# Altium PCB PCB1.PcbDoc
Units mm, origin at the board's own origin, x right, y up, seen from the top; angles counter-clockwise.
Board outline 152.4 x 101.6 mm, 2 copper layers (Top Layer, Bottom Layer); 36 components, 51 nets, 169 pads, 0 vias.
Unrouted connection lines stored in the file: 92.
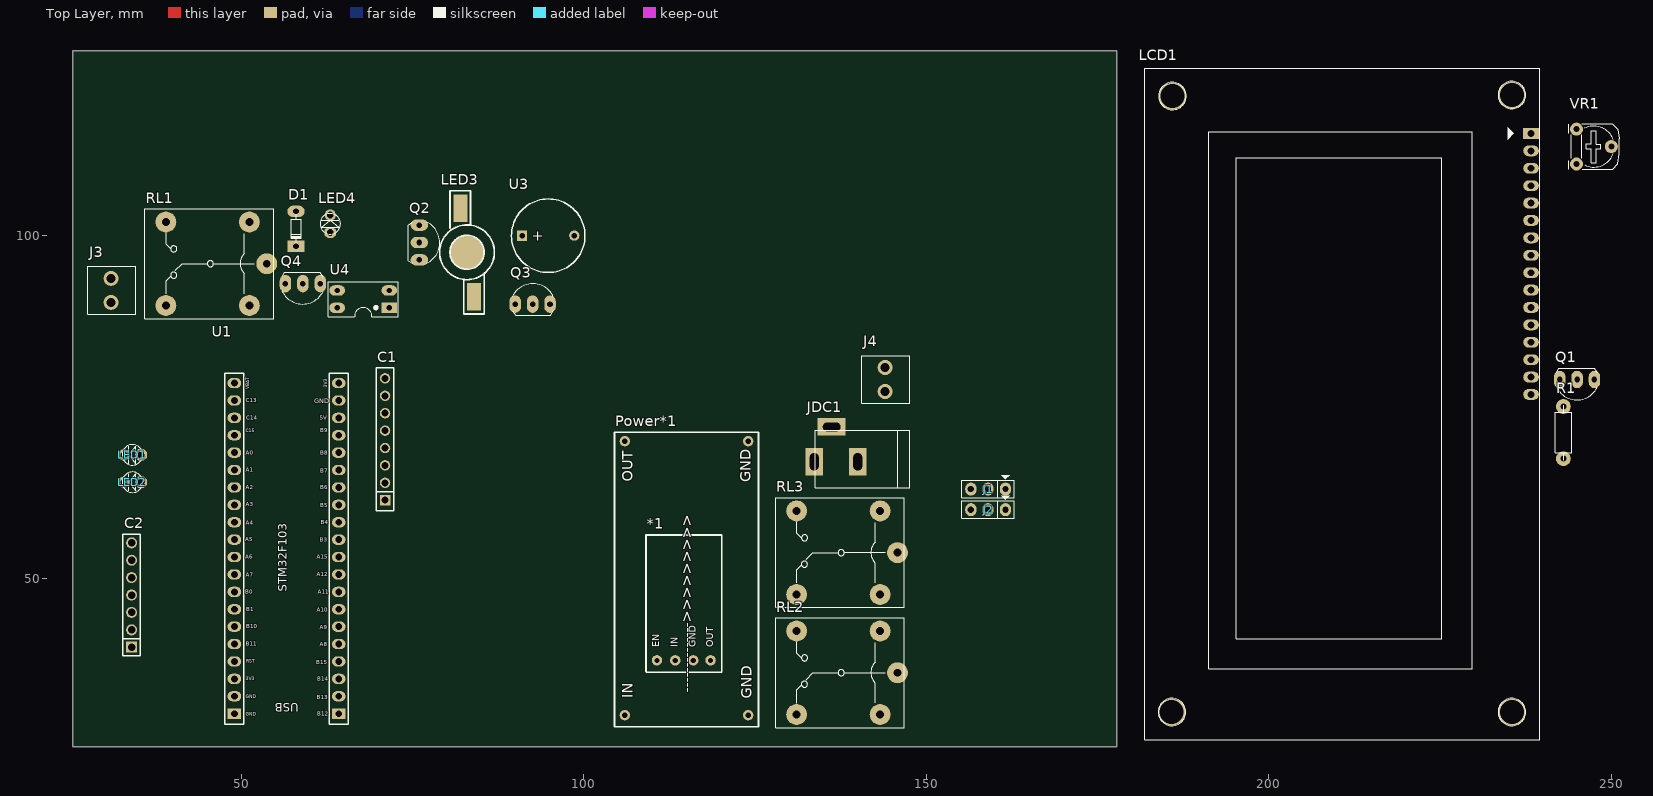
[diagram p0: Top Layer view]
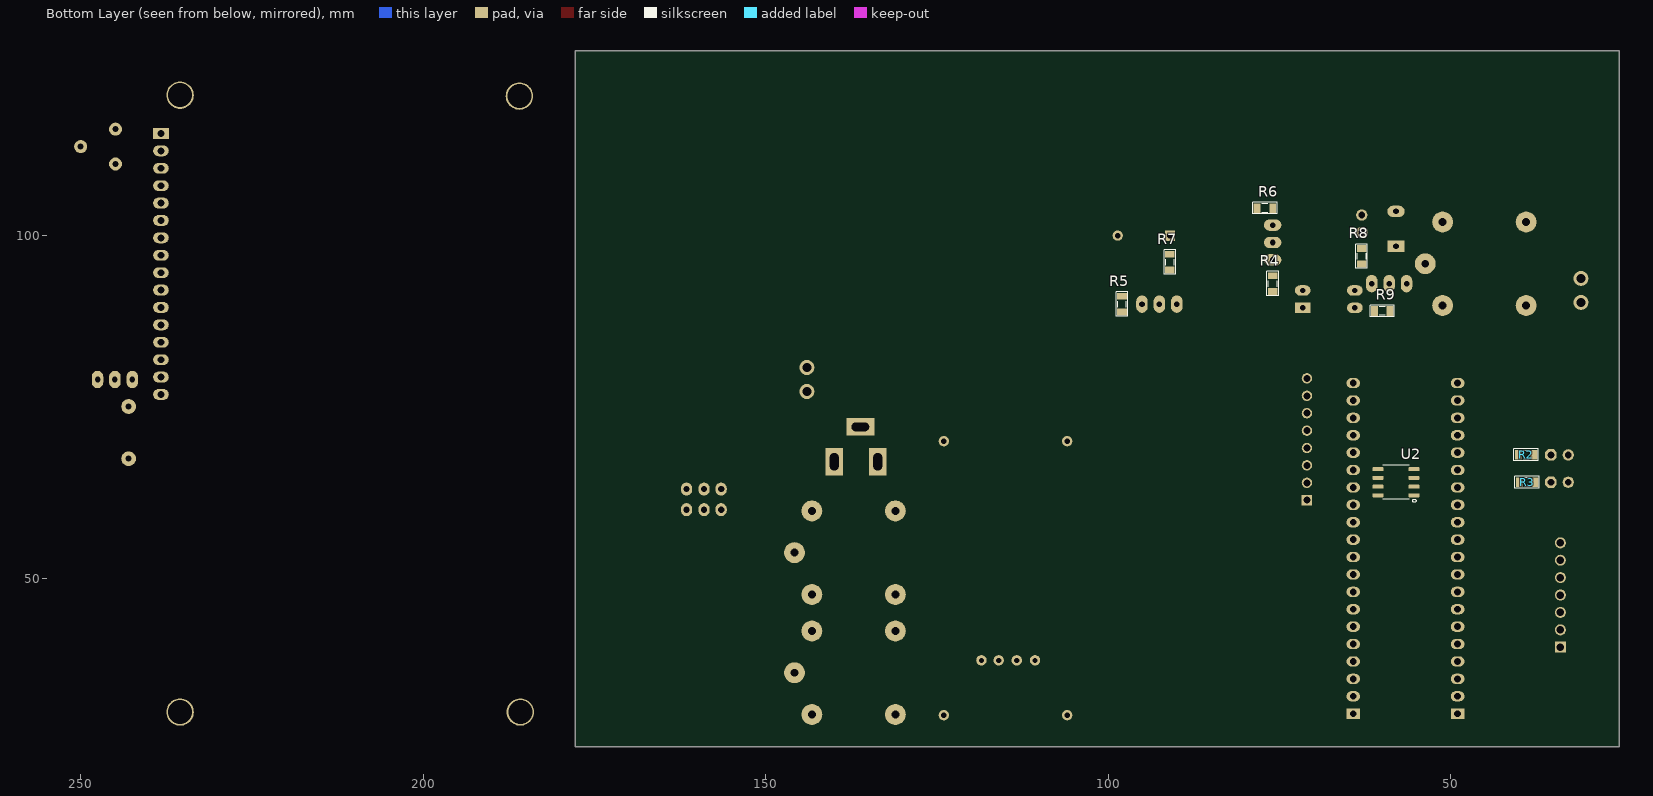
[diagram p1: Bottom Layer view, seen from below]

## Layer stack, top to bottom
Top Solder: solder mask 0.0102, Solder Resist, Dk 3.5
Top Layer: signal copper 0.0356
Dielectric 1: dielectric 0.32, FR-4, Dk 4.8
Bottom Layer: signal copper 0.0356
Bottom Solder: solder mask 0.0102, Solder Resist, Dk 3.5

## Board outline
25.4,25.4 177.8,25.4 177.8,127 25.4,127

## Design rules (kind name [scope] priority, off if disabled: settings)
Clearance [All] p1: gap=0.254 ignorepadtopadclearanceinfootprint=FALSE except(0: Arc-Hole Track-Hole SMDPad-Hole THPad-Hole Via-Hole Fill-Hole Poly-Hole Region-Hole Text-Hole)
PolygonConnect [All] p1: connectstyle=Relief reliefconductorwidth=0.254 reliefentries=4 polygonreliefangle="90 Angle" airgapwidth=0.254
RoomDefinition Power [InComponentClass('Power')] p1: confinementstyle=ConfineIn formatcopy=TRUE lockcomponents=FALSE outline 0,0 50.8,0 50.8,25.4 0,25.4
RoomDefinition Main [InComponentClass('Main')] p2: confinementstyle=ConfineIn formatcopy=TRUE lockcomponents=FALSE outline 0,0 50.8,0 50.8,25.4 0,25.4
RoutingVias [All] p1: holewidth=0.711 width=1.27 viastyle="Through Hole" minholewidth=0.711 minwidth=1.27 maxholewidth=0.711 maxwidth=1.27
SolderMaskExpansion [All] p1: expansion=0.102 istentingtop=FALSE
Width [All] p1: maxlimit=0.254 minlimit=0.254 preferedwidth=0.254
30 further rules are at their usual default settings.

## Classes and differential pairs
component class Power: *1 J4 JDC1 Power*1 RL2 RL3
component class Main: C1 C2 D1 J1 J2 J3 LCD1 LED1 LED2 LED3 LED4 Q1 Q2 Q3 Q4 R1 R2 R3 R4 R5 R6 R7 R8 R9 RL1 U1 U2 U3 U4 VR1

## Components (designator, comment, footprint, x,y, rotation, side; value= is the part's Value field where it differs from the comment)
*1 "Module QS-1205CME-3A" QS-1205CME-3A 110.691,38 r0 top
C1 "RFID" JP8-C1T 71,61.38 r90 top
C2 "JP7" JP7-D1T 34,39.92 r90 top
D1 "Diode" DIO-0.5A-SMALL 58,101 r90 top value=1N5007
J1 "Jumper 3" JP3 159.025,63 r180 top value=J3
J2 "Jumper 3" JP3 159.025,60 r180 top value=J3
J3 "KF2" KF2-3.5 31,92 r90 top
J4 "KF2" KF2-3.5 144,79 r90 top
JDC1 "Jac DC" DC-IN 136.825,69.54 r180 top
LCD1 "LCD 20x4A" LCD20X4A 238.283,114.916 r270 top
LED1 "LED" LED-3MM-BLUE 34,68 r180 top value="LED 3 ly Single Colour"
LED2 "LED" LED-3MM-BLUE 34,64 r180 top value="LED 3 ly Single Colour"
LED3 "LED" "led 1/3w" 82.983,97.562 r90 top value="LED 3 ly Single Colour"
LED4 "LED" LED-3MM-YELLOW 63,100.46 r90 top value="LED 3 ly Single Colour"
Power*1 "Module Buck Boot" Module_BUCK_BOOT 125.5,28.3 r90 top
Q1 "C1815" QTO-92 245,79 r180 top
Q2 "C1815" QTO-92 76,99 r270 top
Q3 "C1815" QTO-92 92.54,90 r0 top
Q4 "2N222" TO92-123 59,93 r180 top value=C1815
R1 "Res" RES-1/4W-SMALL 243,71 r90 top
R2 "Res" RES-SMD-0805 39,68 r0 bottom
R3 "Res" RES-SMD-0805 38.857,64 r0 bottom
R4 "Res-SMD" RES-SMD-0805 76,93 r90 bottom
R5 "Res-SMD" RES-SMD-0805 98,90 r90 bottom
R6 "Res-SMD" RES-SMD-0805 77.143,104 r0 bottom
R7 "Res-SMD" RES-SMD-0805 91,96.143 r90 bottom
R8 "Res" RES-SMD-0805 63,97 r270 bottom
R9 "Res" RES-SMD-0805 60,89 r180 bottom
RL1 "Relay 10A/12V" RL_SPDT_10A 53.732,95.904 r180 top value="Relay SPDT, 10A, 12V"
RL2 "Relay 10A/12V" RL_SPDT_10A 145.806,36.198 r180 top value="Relay SPDT, 10A, 12V"
RL3 "Relay 10A/12V" RL_SPDT_10A 145.806,53.724 r180 top value="Relay SPDT, 10A, 12V"
U1 "STM32F103C8T6_Blue" "STM32F103 Blue Pill" 54.08,50.54 r90 top
U2 "AT24Cxx" SOP8smd 58,64 r0 bottom
U3 "BUZZ" BUZZER_through_hole 91,100 r0 top
U4 "PC817" DIP4/W0.3 71.62,89.46 r90 top
VR1 "10K" VR 244.92,115.54 r270 top value="VR 10K"

## Footprints (in the part's own frame and the unit in brackets; to place one, negate y for a bottom-side part, rotate by r counter-clockwise, add the part's x,y. Pads: shape width x height; smd on the part's side, far side on the other; paste and mask are expansions set on the pad)
BUZZER_through_hole [mm]
  rect 1.5x1.5 hole 0.8: 1(0,0)
  round 1.5 hole 0.8: 2(7.62,0.013)
  silkscreen extent -1.55,-5.38 9.18,5.36, body extent -2.22,-6 9.78,6, height 4.5
DC-IN [mil] "Jac DC input"
  rect 100x160 hole 50 slot 100 at 90 deg: 1(125,100) 2(-125,100)
  rect 160x100 hole 50 slot 100 at 0 deg: 3(25,-100)
  silkscreen extent -425,-80 120,250, body extent -410,-105 134,269, height 434
DIO-0.5A-SMALL [mil] "Diode muoi, W 80mil, L 300mil"
  oval 65x100 hole 32: 1(100,0)
  rect 65x100 hole 32: 2(-100,0)
  silkscreen extent -80,-30 80,28, body extent -108,-33 108,32, height 61
DIP4/W0.3 [mil] "4 PIN, W 300mil, Pin to pin 100mil"
  rect 60x90 hole 31: 1(0,0)
  oval 60x90 hole 31: 2(100,0) 3(100,300) 4(0,300)
  silkscreen extent -50,-50 150,350, body extent -59,-10 159,305, height 170
JP3 [mil] "Jumper 3"
  oval 65x75 hole 36: 1(-100,0) 2(1,0) 3(99,0)
  silkscreen extent -150,-81 150,50, body extent -150,-60 150,55, height 355
JP7-D1T [mm] "7 pins, 1 row, straight, gold plating"
  rect 1.6x1.6 hole 1.1: 1(0,0)
  round 1.6 hole 1.1: 2(2.54,0) 3(5.08,0) 4(7.62,0) 5(10.16,0) 6(12.7,0) 7(15.24,0)
  silkscreen extent -1.27,-1.27 16.51,1.27, body extent -1.27,-1.27 16.51,1.27, height 8.54
JP8-C1T [mm] "8 row, straight, gold plating"
  rect 1.52x1.52 hole 1.02: 1(0,0)
  round 1.52 hole 1.02: 2(2.54,0) 3(5.08,0) 4(7.62,0) 5(10.16,0) 6(12.7,0) 7(15.24,0) 8(17.78,0)
  silkscreen extent -1.52,-1.27 19.3,1.27, body extent -1.52,-1.25 19.3,1.25, height 8.51
KF2-3.5 [mm] "3,50mm - modular - blue - Horizontal wire entry - Pressure clamp - 8,4mm height - 02p"
  round 2.2 hole 1.3: 1(-1.75,0) 2(1.75,0)
  silkscreen extent -3.5,-3.6 3.5,3.4, body extent -3.95,-3.6 4.05,3.4, height 8.41
LCD20X4A [mil] "LCD dipslay 20x4, 16 pin"
  rect 62x90 hole 39: 1(0,0)
  oval 62x90 hole 39: 2(100,0) 3(200,0) 4(300,0) 5(400,0) 6(500,0) 7(600,0) 8(700,0) 9(800,0) 10(900,0) 11(1000,0) 12(1100,0) 13(1200,0) 14(1300,0) 15(1400,0) 16(1500,0)
  round 157.48 hole 137.8: "Hole 0"(-220,-110) "Hole 0"(-215,-2060) "Hole 0"(3325,-110) "Hole 0"(3325,-2065)
  silkscreen extent -375,-2220 3485,50, body extent -392,-2264 3466,98, height 417
"led 1/3w" [mm]
  rect 4x2 smd: 1(-6.5,-1) 2(6.438,0.983)
  round 5 smd: ""(0.008,0.022)
  silkscreen extent -9,-3.97 9,4.01, body extent -7.25,-4.06 7.25,4.06, height 5.32
LED-3MM-BLUE [mil]
  oct 65x65 hole 40: 1(-55,0)
  round 65 hole 40: 2(45,0)
  silkscreen extent -64,-59 54,59, body extent -72,-65 54,65, height 184
LED-3MM-YELLOW [mil]
  oct 65x65 hole 40: 1(0,0)
  round 65 hole 40: 2(100,0)
  silkscreen extent -9,-59 109,59, body extent -27,-77 117,80, height 181
Module_BUCK_BOOT [mil]
  round 60 hole 30: 1(66.93,767.72) 2(66.93,59.06) 3(1641.73,59.06) 4(1641.73,767.72)
  silkscreen extent 0,0 1693,827, body extent -1,-1 1692,826, height 583
QS-1205CME-3A [mil]
  round 60 hole 30: 1(0,0) 2(105,0) 3(209,0) 4(308,0)
  silkscreen extent -63,-68 373,721, body extent -60,-66 374,721, height 535
QTO-92 [mil] "TO-92"
  oval 66x100 hole 32: 1(-100,0) 2(0,0) 3(100,0)
  silkscreen extent -117,-65 120,118, body extent -109,-66 109,95, height 245
RES-1/4W-SMALL [mil]
  round 85 hole 35: 1(-140,0) 2(160,0)
  silkscreen extent -148,-47 166,47, body extent -152,-47 172,47, height 97
RES-SMD-0805 [mil]
  rect 39.37x55 smd: 1(-45,0) 2(45,0)
  silkscreen extent -70,-34 70,33, body extent -39,-25 39,25, height 31
RL_SPDT_10A [mil] "Relay SPDT, 5 pin, 10A,W 650mil, L 800mil, H 800mil"
  round 120 hole 45: 1(0,0) 2(580,240) 3(580,-240) 4(100,-240) 5(100,240)
  silkscreen extent -40,-315 700,315, body extent -46,-304 706,306, height 602
SOP8smd [mm]
  rrect40% 1.58x0.589 smd: 1(-2.625,1.905) 2(-2.625,0.635) 3(-2.625,-0.635) 4(-2.625,-1.905) 5(2.625,-1.905) 6(2.625,-0.635) 7(2.625,0.635) 8(2.625,1.905)
  silkscreen extent -2.93,-2.51 1.95,2.95, body extent -2.92,-2.41 3.06,2.49, height 1.58
"STM32F103 Blue Pill" [mm]
  rect 1.5x2 hole 1: 1(-20.32,-10.16) 40(-20.32,5.08)
  oval 1.5x2 hole 1: 2(-17.78,-10.16) 3(-15.24,-10.16) 4(-12.7,-10.16) 5(-10.16,-10.16) 6(-7.62,-10.16) 7(-5.08,-10.16) 8(-2.54,-10.16) 9(0,-10.16) 10(2.54,-10.16) 11(5.08,-10.16) 12(7.62,-10.16) 13(10.16,-10.16) 14(12.7,-10.16) 15(15.24,-10.16) 16(17.78,-10.16) 17(20.32,-10.16) 18(22.86,-10.16) 19(25.4,-10.16) 20(27.94,-10.16) 21(27.94,5.08) 22(25.4,5.08) 23(22.86,5.08) 24(20.32,5.08) 25(17.78,5.08) 26(15.24,5.08) 27(12.7,5.08) 28(10.16,5.08) 29(7.62,5.08) 30(5.08,5.08) 31(2.54,5.08) 32(0,5.08) 33(-2.54,5.08) 34(-5.08,5.08) 35(-7.62,5.08) 36(-10.16,5.08) 37(-12.7,5.08) 38(-15.24,5.08) 39(-17.78,5.08)
  silkscreen extent -21.84,-11.56 29.34,6.48, body extent -23.62,-14.22 33.94,8.64, height 14.77
TO92-123 [mil] "TO-92"
  oval 66x100 hole 32: 1(-100,0) 2(0,0) 3(100,0)
  silkscreen extent -117,-65 120,118, body extent -109,-66 109,95, height 245
VR [mil] "Resistor Variable"
  round 75 hole 35: 1(0,0) 2(100,200) 3(200,0)
  silkscreen extent -31,-44 231,246, body extent -87,-30 307,372, height 165

## Part data
*1: "Mạch Hạ Áp Mini 3A Nhiều Đầu Ra QS-1205CME-3A"
C1: library part JP8, "WR-PHD 2.54 mm Angled Socket Header", Manufacturer="W¨¹rth Elektronik eiSos GmbH", partNo=613008143121, ComponentLink1 Description=Manufacturer, ComponentLink1URL=http://www.we-online.com, ComponentLink2 Description=Datasheet, ComponentLink2URL=http://katalog.we-online.de/em/datasheet/6130xx143121.pdf, Created by="Karrer Zheng", Created Date="29 March 2013", NoPins=08
C2: "WR-PHD 2.54 mm Angled Socket Header", Manufacturer="W¨¹rth Elektronik eiSos GmbH", partNo=613007143121, ComponentLink1 Description=Manufacturer, ComponentLink1URL=http://www.we-online.com, ComponentLink2 Description=Datasheet, ComponentLink2URL=http://katalog.we-online.de/em/datasheet/6130xx143121.pdf, Created by="Karrer Zheng", Created Date="29 March 2013", NoPins=07
D1: "Default Diode", Code - JEDEC=DO-214-AB, Published=8-Jun-2000, Publisher="Altium Limited", Revision="July-2002: Re-released for DXP Platform."
J1 J2: library part JP3
J3 J4: Manufacturer="Würth Elektronik eiSos GmbH", partNo=691103110002, ComponentLink1 Description=Manufacturer, ComponentLink1URL=http://www.we-online.com, ComponentLink2 Description=Datasheet, ComponentLink2URL=http://katalog.we-online.de/em/datasheet/6911031100xx.pdf, Created by="Karrer Zheng", Created Date="29 October 2013", NoPins=2
JDC1: library part DCIN, "Jac DC input"
LCD1: library part LCD20x4A, "LCD dipslay 20 char, 4 line"
LED1 LED2 LED3 LED4: "LED Single colour Green and Red"
Q1 Q2 Q3 Q4: "NPN 600mW, ECB"
  Q4: Creat by=MT-TECH.VN
R1: Manufacturer="Generic Components", Class=Passive, Published=08/06/2000, Publisher="Altium Hobart Technology Centre", SubClass=R
R2 R3 R8 R9: library part Res-SMD, "Resistor", Manufacturer="Generic Components", Class=Passive, Published=08/06/2000, Publisher="Altium Hobart Technology Centre"
R4 R5 R6 R7: "Resistor", Manufacturer="Generic Components", Class=Passive, Published=08/06/2000, Publisher="Altium Hobart Technology Centre"
RL1 RL2 RL3: library part "Relay 1", "Relay SPDT,10A - 12VDC 5 Pin"
U1: "Kit STM32F103C8T6 Blue Pill"
U3: library part Speaker, "Loudspeaker"
U4: "Single Opto"
VR1: library part VR1, "Var Resistor"

## Nets (pads, with @x,y where several pads share a name; then routed paths per layer and width w, separated by ;. In a path a pad name is that pad's centre, name@x,y a point inside that pad or via, vN(x,y) a via of type N, cw(c..) or ccw(c..) an arc to the next point about the centre after c; other vN are vias at no path point)
+3v3: *1.4 C1.8 U1.20
+5: D1.2 J1.3 J2.3 LCD1.2 Power*1.4 Q1.2 Q2.2 Q3.2 R8.1 RL1.5 U2.8 U4.3 VR1.3
+12: *1.2 Power*1.1 RL1.3 RL2.1
BAT: J4.2 RL2.2 RL3.1
Buzz: R5.1 U1.6
"CB HongNgoai": J1.2 U1.16
"CB HongNgoai 2": J2.2 U1.17
Cot1: C2.7 U1.30
Cot2: C2.6 U1.31
Cot3: C2.5 U1.32
D4: LCD1.11 U1.2
D5: LCD1.12 U1.3
D6: LCD1.13 U1.4
D7: LCD1.14 U1.5
EN: LCD1.6 U1.29
GND: *1.3 C1.6 J1.1 J2.1 J3.1 J4.1 JDC1.2 LCD1.1 LCD1.16 LED1.1 LED2.1 LED3.1 Power*1.2 Power*1.3 Q4.1 RL2.5 U1.19 U2.1 U2.2 U2.3 U2.4 U3.2 U4.1 VR1.1
Hang1: C2.4 U1.33
Hang2: C2.3 U1.34
Hang3: C2.2 U1.35
Hang4: C2.1 U1.36
"LED LCD": R1.1 U1.1
"LED Show": R4.1 U1.7
MISO: C1.4 U1.12
MOSI: C1.3 U1.13
NetD1_1: D1.1 LED4.2 Q4.3 RL1.4
NetJ3_2: J3.2 RL1.1
NetLCD1_3: LCD1.3 VR1.2
NetLCD1_15: LCD1.15 Q1.1
NetLED1_2: LED1.2 R2.1
NetLED2_2: LED2.2 R3.1
NetLED3_2: LED3.2 R6.2
NetLED4_1: LED4.1 R8.2
NetQ1_3: Q1.3 R1.2
NetQ2_1: Q2.1 R6.1
NetQ2_3: Q2.3 R4.2
NetQ3_1: Q3.1 R7.1
NetQ3_3: Q3.3 R5.2
NetQ4_2: Q4.2 R9.2
NetR2_2: R2.2 U1.25
NetR3_2: R3.2 U1.26
NetR7_2: R7.2 U3.1
NetR9_1: R9.1 U4.4
RS: LCD1.4 U1.27
"RST RFID": C1.7 U1.9
RW: LCD1.5 U1.28
SCK: C1.2 U1.11
SCL: U1.14 U2.6
SDA: U1.15 U2.5
"SIGN RELAY": U1.8 U4.2
SS: C1.1 U1.10
VCC: JDC1.1 RL2.3 RL2.4 RL3.3
pads on no net: "LCD1.Hole 0" *1.1 C1.5 JDC1.3 LCD1.7 LCD1.8 LCD1.9 LCD1.10 LED3. RL1.2 RL3.2 RL3.4 RL3.5 U1.18 U1.21 U1.22 U1.23 U1.24 U1.37 U1.38 U1.39 U1.40 U2.7

## Text inside footprints (layer, text, board x,y; h text height)
*1: Top Overlay "OUT" at 118.87,39.905 h1 r90; Top Overlay "GND" at 116.356,39.905 h1 r90; Top Overlay "IN" at 113.714,39.905 h1 r90; Top Overlay "EN" at 111.047,39.905 h1 r90
Power*1: Top Overlay "OUT" at 107.125,64.075 h1.52 r90; Top Overlay "IN" at 107.15,32.45 h1.52 r90; Top Overlay "GND" at 124.375,64 h1.52 r90; Top Overlay "GND" at 124.5,32.4 h1.52 r90; Top Overlay "-------------->>>>>>>>>" at 115.8,33.3 h1.52 r90
U1: Top Overlay "C13" at 50.685,75.661 h0.6; Top Overlay "C14" at 50.711,73.095 h0.6; Top Overlay "C15" at 50.66,71.292 h0.5; Top Overlay "A0" at 50.634,68.041 h0.6; Top Overlay "A1" at 50.66,65.551 h0.6; Top Overlay "A2" at 50.66,62.961 h0.6; Top Overlay "A3" at 50.66,60.471 h0.6; Top Overlay "A4" at 50.634,57.779 h0.6; Top Overlay "A5" at 50.609,55.391 h0.6; Top Overlay "A6" at 50.609,52.851 h0.6; Top Overlay "A7" at 50.685,50.21 h0.6; Top Overlay "B0" at 50.609,47.695 h0.6; Top Overlay "B1" at 50.711,45.206 h0.6; Top Overlay "B11" at 50.685,40.101 h0.6; Top Overlay "B10" at 50.711,42.666 h0.6; Top Overlay "RST" at 50.711,37.662 h0.5; Top Overlay "3V3" at 50.685,35.097 h0.5; Top Overlay "GND" at 50.66,32.481 h0.5; Top Overlay "GND" at 50.66,29.941 h0.5; Top Overlay "GND" at 60.693,75.508 h0.7; Top Overlay "5V" at 61.48,73.146 h0.6; Top Overlay "B9" at 61.506,71.317 h0.6; Top Overlay "B8" at 61.506,67.99 h0.6; Top Overlay "B7" at 61.531,65.424 h0.6; Top Overlay "B6" at 61.531,63.011 h0.6; Top Overlay "B5" at 61.506,60.344 h0.6; Top Overlay "B4" at 61.582,57.881 h0.6; Top Overlay "B3" at 61.48,55.315 h0.6; Top Overlay "A15" at 61.048,52.801 h0.6; Top Overlay "A12" at 60.998,50.261 h0.6; Top Overlay "A11" at 61.175,47.695 h0.6; Top Overlay "A10" at 61.048,45.104 h0.6; Top Overlay "A9" at 61.48,42.514 h0.6; Top Overlay "A8" at 61.455,40.075 h0.6; Top Overlay "B15" at 60.972,37.434 h0.6; Top Overlay "B14" at 61.074,34.995 h0.6; Top Overlay "B13" at 61.023,32.354 h0.6; Top Overlay "B12" at 61.074,29.89 h0.6; Top Overlay "USB" at 58.398,31.744 h1.2 r180; Top Overlay "VBAT" at 51.168,77.591 h0.5 r90; Top Overlay "3V3" at 62.572,77.794 h0.5 r90; Top Overlay "STM32F103" at 56.62,48 h1.2 r90
U3: Top Overlay "+" at 92.41,99.289 h1.52